# EAGLE board ELFKIN_TEST_A (EAGLE 7.7.0)
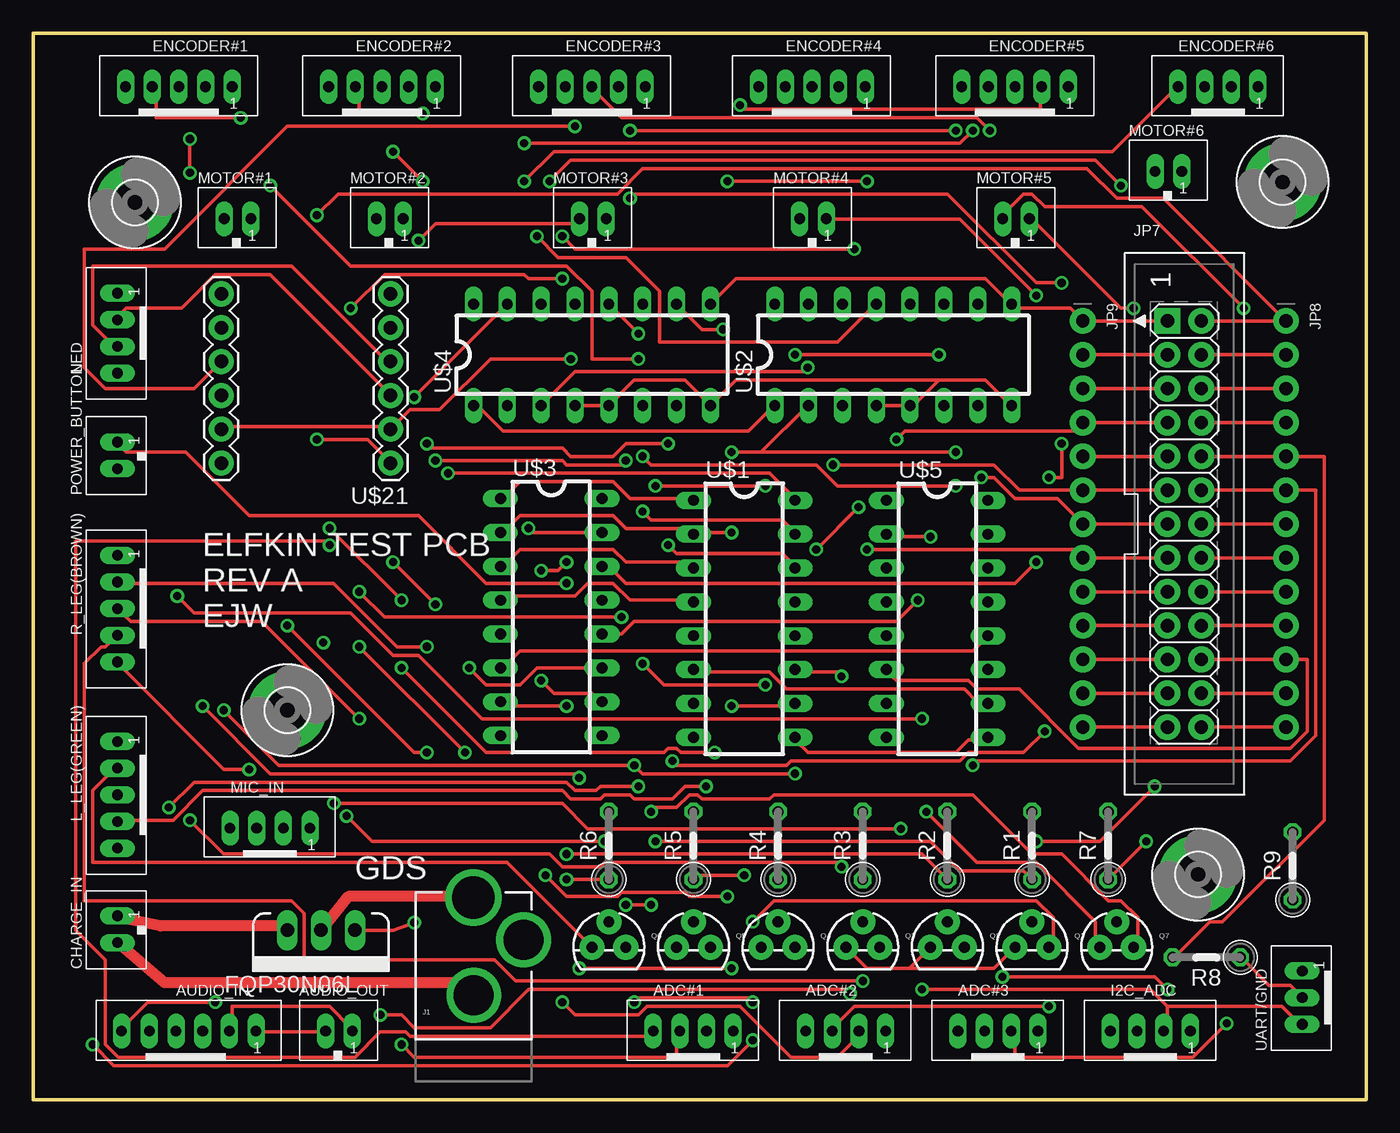
[diagram p0: board, top side]
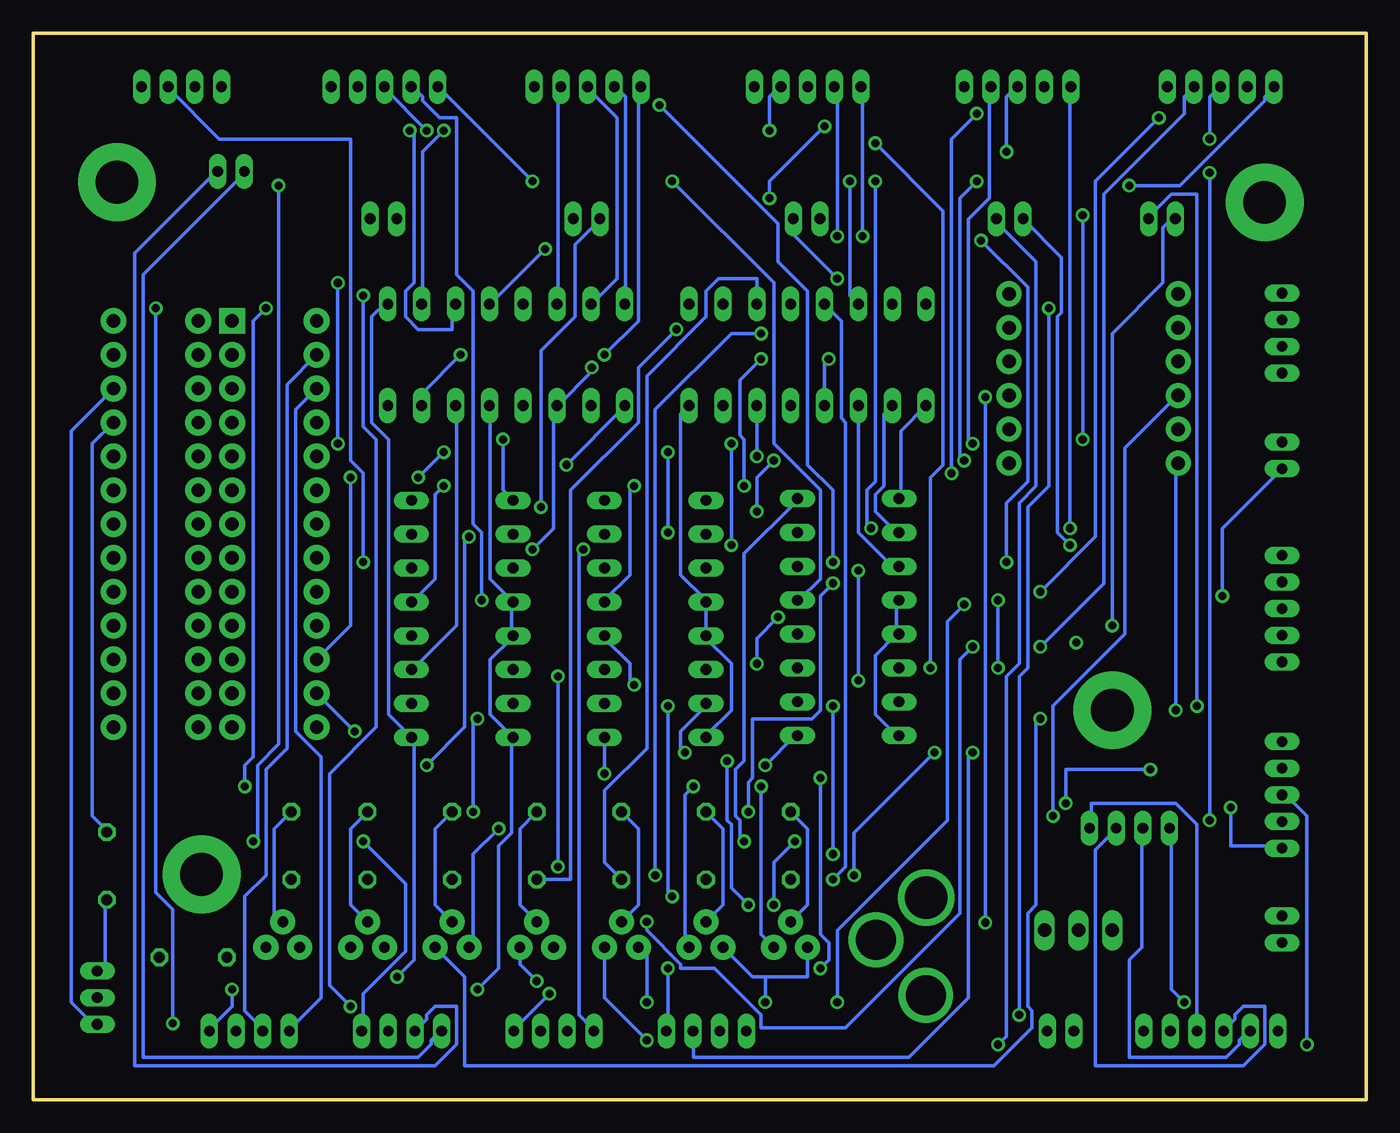
[diagram p1: board, bottom side, seen from below]

Size 100 x 80 mm. Coordinates in mm from the lower left corner, seen from the top.
Outline: 0,80 100,80 100,0 0,0 0,80
Copper layers (1*16): Top 0.035mm / dielectric 1.5mm / Bottom 0.035mm
Design rules "default *": minimum track width 10mil, minimum drill 24mil, track to track 8mil, track to pad 8mil, pad to pad 8mil, via to via 8mil, smd to smd 8mil, copper to edge 80mil, drill to drill 8mil, minimum pad ring 10mil, minimum via ring 8mil, stop-mask expansion 4mil, vias tented up to drill 0mil, thermal gap 10mil
Net classes: 0 default: clearance 0.205 mm

## Footprints (pad centres in the part's own frame; a part is rotated, then mirrored left to right if it is on the bottom)
JST_B4B-PH_HEADER = drill 0.8 long: P1 2.98,0.048; P2 0.98,0.048; P3 -1.02,0.048; P4 -3.02,0.048
JST_B6B-PH_HEADER = drill 0.8 long: P1 4,0.048; P2 2,0.048; P3 0,0.048; P4 -2,0.048; P5 -4,0.048; P6 -6.076,0.048
JST_B2B-PH_HEADER = drill 0.8 long: P1 1.075,0.048; P2 -0.925,0.048
JST_B5B-PH_HEADER = drill 0.8 long: P1 4,0.048; P2 2,0.048; P3 0,0.048; P4 -2,0.048; P5 -4,0.048
TO220V = drill 1.016 long: 1 -2.54,0; 2 0,0; 3 2.54,0
3,2-PAD = drill 3.2 pad 5.842: B3,2 0,0
POWER_JACK_PTH_LOCK = drill 2.997 pad 4.115: GND 0.025,6.557; GNDBREAK 3.762,10.7 | drill 3.2 pad 4.115: PWR 0,13.878
RASBERRYPI_IDC = drill 1 pad 1.93 square: 1 -1.27,15.24 | drill 1 pad 1.93: 2 1.27,15.24; 3 -1.27,12.7; 4 1.27,12.7; 5 -1.27,10.16; 6 1.27,10.16; 7 -1.27,7.62; 8 1.27,7.62; 9 -1.27,5.08; 10 1.27,5.08; 11 -1.27,2.54; 12 1.27,2.54; 13 -1.27,0; 14 1.27,0; 15 -1.27,-2.54; 16 1.27,-2.54; 17 -1.27,-5.08; 18 1.27,-5.08; 19 -1.27,-7.62; 20 1.27,-7.62; 21 -1.27,-10.16; 22 1.27,-10.16; 23 -1.27,-12.7; 24 1.27,-12.7; 25 -1.27,-15.24; 26 1.27,-15.24
1X13_ROUND_76MIL = drill 1 pad 1.93: 1 -15.24,0; 2 -12.7,0; 3 -10.16,0; 4 -7.62,0; 5 -5.08,0; 6 -2.54,0; 7 0,0; 8 2.54,0; 9 5.08,0; 10 7.62,0; 11 10.16,0; 12 12.7,0; 13 15.24,0
TO-92 = drill 0.813 pad 1.88: 1 -1.27,0; 2 0,1.905; 3 1.27,0
0207/5V = drill 0.813 octagon: 1 -2.54,0; 2 2.54,0
DIL16 = drill 0.813 long: 1 -8.89,-3.81; 2 -6.35,-3.81; 3 -3.81,-3.81; 4 -1.27,-3.81; 5 1.27,-3.81; 6 3.81,-3.81; 7 6.35,-3.81; 8 8.89,-3.81; 9 8.89,3.81; 10 6.35,3.81; 11 3.81,3.81; 12 1.27,3.81; 13 -1.27,3.81; 14 -3.81,3.81; 15 -6.35,3.81; 16 -8.89,3.81
LEVEL_SHIFTER = drill 1.016 pad 1.88: 1 6.35,7.62; 2 6.35,5.08; 3 6.35,2.54; 4 6.35,0; 5 6.35,-2.54; 6 6.35,-5.08; 7 -6.35,7.62; 8 -6.35,5.08; 9 -6.35,2.54; 10 -6.35,0; 11 -6.35,-2.54; 12 -6.35,-5.08
JST_B3B-PH_HEADER = drill 0.8 long: P1 2.027,0.048; P2 0.028,0.048; P3 -1.972,0.048

## Placement (x,y rotation side)
ADC#1  JST-PH_4-PIN_HEADER  [JST_B4B-PH_HEADER]  49.53,5.08 0 top
ADC#2  JST-PH_4-PIN_HEADER  [JST_B4B-PH_HEADER]  60.96,5.08 0 top
ADC#3  JST-PH_4-PIN_HEADER  [JST_B4B-PH_HEADER]  72.39,5.08 0 top
AUDIO_IN  JST-PH-6-PIN_HEADERJST_B6B-PH_HEADER  [JST_B6B-PH_HEADER]  12.7,5.08 0 top
AUDIO_OUT  JST-PH_2-PIN_HEADER  [JST_B2B-PH_HEADER]  22.86,5.08 0 top
CHARGE_IN  JST-PH_2-PIN_HEADER  [JST_B2B-PH_HEADER]  6.35,12.7 90 top
ENCODER#1  JST-PH_5-PIN_HEADER  [JST_B5B-PH_HEADER]  10.92,75.95 0 top
ENCODER#2  JST-PH_5-PIN_HEADER  [JST_B5B-PH_HEADER]  26.16,75.95 0 top
ENCODER#3  JST-PH_5-PIN_HEADER  [JST_B5B-PH_HEADER]  41.91,75.95 0 top
ENCODER#4  JST-PH_5-PIN_HEADER  [JST_B5B-PH_HEADER]  58.42,75.95 0 top
ENCODER#5  JST-PH_5-PIN_HEADER  [JST_B5B-PH_HEADER]  73.66,75.95 0 top
ENCODER#6  JST-PH_4-PIN_HEADER  [JST_B4B-PH_HEADER]  88.9,75.95 0 top
FQP30N06L  MOSFET-NCHANNELFQP30N06L  [TO220V]  21.59,12.7 180 top
FRAME1  FRAME-LETTER  [CREATIVE_COMMONS]  -101.6,1.27 0 top  (outside the outline)
H1  MOUNT-PAD-ROUND3.2  [3,2-PAD]  19.05,29.21 0 top
H2  MOUNT-PAD-ROUND3.2  [3,2-PAD]  87.38,16.89 0 top
H3  MOUNT-PAD-ROUND3.2  [3,2-PAD]  7.62,67.31 0 top
H4  MOUNT-PAD-ROUND3.2  [3,2-PAD]  93.73,68.83 0 top
I2C_ADC  JST-PH_4-PIN_HEADER  [JST_B4B-PH_HEADER]  83.82,5.08 0 top
J1  POWER_JACKPTH_LOCK  [POWER_JACK_PTH_LOCK]  33.02,1.27 0 top
JP7  PI  [RASBERRYPI_IDC]  86.36,43.18 0 top
JP8  Right  [1X13_ROUND_76MIL]  93.98,43.18 270 top
JP9  Left  [1X13_ROUND_76MIL]  78.74,43.18 270 top
L_LEG(GREEN)  JST-PH_5-PIN_HEADER  [JST_B5B-PH_HEADER]  6.35,22.86 90 top
LED  JST-PH_4-PIN_HEADER  [JST_B4B-PH_HEADER]  6.35,57.53 90 top
MIC_IN  JST-PH_4-PIN_HEADER  [JST_B4B-PH_HEADER]  17.78,20.32 0 top
MOTOR#1  JST-PH_2-PIN_HEADER  [JST_B2B-PH_HEADER]  15.24,66.04 0 top
MOTOR#2  JST-PH_2-PIN_HEADER  [JST_B2B-PH_HEADER]  26.67,66.04 0 top
MOTOR#3  JST-PH_2-PIN_HEADER  [JST_B2B-PH_HEADER]  41.91,66.04 0 top
MOTOR#4  JST-PH_2-PIN_HEADER  [JST_B2B-PH_HEADER]  58.42,66.04 0 top
MOTOR#5  JST-PH_2-PIN_HEADER  [JST_B2B-PH_HEADER]  73.66,66.04 0 top
MOTOR#6  JST-PH_2-PIN_HEADER  [JST_B2B-PH_HEADER]  85.09,69.6 0 top
POWER_BUTTON  JST-PH_2-PIN_HEADER  [JST_B2B-PH_HEADER]  6.35,48.26 90 top
Q1  [TO-92]  74.93,11.43 0 top
Q2  [TO-92]  68.58,11.43 0 top
Q3  [TO-92]  62.23,11.43 0 top
Q4  [TO-92]  55.88,11.43 0 top
Q5  [TO-92]  49.53,11.43 0 top
Q6  [TO-92]  43.18,11.43 0 top
Q7  [TO-92]  81.28,11.43 0 top
R1  1k  [0207/5V]  74.93,19.05 90 top
R2  1k  [0207/5V]  68.58,19.05 90 top
R3  1k  [0207/5V]  62.23,19.05 90 top
R4  1k  [0207/5V]  55.88,19.05 90 top
R5  1k  [0207/5V]  49.53,19.05 90 top
R6  1k  [0207/5V]  43.18,19.05 90 top
R7  [0207/5V]  80.64,19.05 90 top
R8  2.2k  [0207/5V]  88.01,10.67 180 top
R9  2.2k  [0207/5V]  94.49,17.53 90 top
R_LEG(BROWN)  JST-PH_5-PIN_HEADER  [JST_B5B-PH_HEADER]  6.35,36.83 90 top
U$1  74LVC138ADDIL16  [DIL16]  53.34,36.07 270 top
U$2  74LVC138ADDIL16  [DIL16]  64.52,55.88 0 top
U$3  74LVC138ADDIL16  [DIL16]  38.86,36.2 270 top
U$4  74LVC138ADDIL16  [DIL16]  41.91,55.88 0 top
U$5  74LVC138ADDIL16  [DIL16]  67.82,36.07 270 top
U$21  LEVEL_SHIFTER  [LEVEL_SHIFTER]  20.45,55.37 180 top
UART/GND  JST-PH_3-PIN_HEADER  [JST_B3B-PH_HEADER]  95.25,7.62 90 top

## Library data of the parts
ADC#1-ADC#3 AUDIO_OUT CHARGE_IN ENCODER#1-ENCODER#6 I2C_ADC L_LEG(GREEN) LED MIC_IN MOTOR#1-MOTOR#6 POWER_BUTTON R_LEG(BROWN) UART/GND = SRG
AUDIO_IN = JST_Connectors
FQP30N06L = SparkFun-DiscreteSemi; PROD_ID: TRANS-10060
FRAME1 = SparkFun-Aesthetics
H1-H4 = holes
J1 = SparkFun-Connectors; PROD_ID: CONN-08197; SF_ID: PRT-00119
JP7-JP9 = microbuilder
Q1-Q7 = SparkFun-DiscreteSemi; PROD_ID: TRANS-08447
R1-R9 = resistor
U$1-U$5 = SparkFun-DigitalIC
U$21 = SparkFun-Connectors

## Nets
3.3V: I2C_ADC.P1 JP7.1 JP9.1 U$1.9 U$2.9 U$3.9 U$4.9 U$5.9 U$21.1
5.0V: JP7.2 JP8.1 U$21.7
GND: I2C_ADC.P2 JP7.6 JP8.3 U$1.4 U$1.5 U$1.8 U$2.4 U$2.5 U$2.8 U$3.4 U$3.5 U$3.8 U$4.4 U$4.5 U$4.8 U$5.4 U$5.5 U$5.8 U$21.2 U$21.8 UART/GND.P3
N$1: JP7.11 JP9.6 U$1.1 U$2.1 U$3.1 U$4.1
N$2: JP7.13 JP9.7 U$1.2 U$2.2 U$3.2 U$4.2
N$3: JP7.15 JP9.8 U$1.3 U$2.3 U$3.3 U$4.3
N$4: ENCODER#1.P2 U$1.10
N$5: ENCODER#1.P3 U$1.11
N$6: ENCODER#1.P4 U$1.12
N$7: ENCODER#1.P5 U$1.13
N$8: ENCODER#2.P2 U$1.14
N$9: ENCODER#2.P3 U$1.15
N$10: ENCODER#2.P4 U$1.16
N$11: ENCODER#2.P5 U$1.7
N$12: ENCODER#3.P2 U$2.10
N$13: ENCODER#3.P3 U$2.11
N$14: ENCODER#3.P4 U$2.12
N$15: ENCODER#3.P5 U$2.13
N$16: ENCODER#4.P2 U$2.14
N$17: ENCODER#4.P3 U$2.15
N$18: ENCODER#4.P4 U$2.16
N$19: ENCODER#4.P5 U$2.7
N$20: ENCODER#5.P2 U$3.10
N$21: ENCODER#5.P3 U$3.11
N$22: ENCODER#5.P4 U$3.12
N$23: ENCODER#5.P5 U$3.13
N$24: ENCODER#6.P2 U$3.14
N$25: ENCODER#6.P4 U$3.15
N$26: R2.1 U$3.7
N$27: ADC#1.P1 MOTOR#1.P1
N$28: ADC#1.P2 MOTOR#1.P2
N$29: ADC#1.P3 MOTOR#2.P1
N$30: ADC#1.P4 MOTOR#2.P2
N$31: ADC#2.P1 MOTOR#3.P1
N$32: ADC#2.P2 MOTOR#3.P2
N$33: ADC#2.P3 MOTOR#4.P1
N$34: ADC#2.P4 MOTOR#4.P2
N$35: ADC#3.P1 MOTOR#5.P1
N$36: ADC#3.P2 MOTOR#5.P2
N$37: ADC#3.P3 MOTOR#6.P1
N$38: ADC#3.P4 MOTOR#6.P2
N$39: Q1.2 R1.2
N$40: Q3.2 R3.2
N$41: Q2.2 R2.2
N$42: Q4.2 R4.2
N$43: Q5.2 R5.2
N$44: Q6.2 R6.2
N$45: R1.1 U$3.16
N$46: R3.1 U$4.10
N$47: R4.1 U$4.11
N$48: R5.1 U$4.12
N$49: Q1.1 Q2.1 Q3.1 R_LEG(BROWN).P5
N$50: R6.1 U$4.13
N$51: AUDIO_IN.P3 MIC_IN.P1
N$52: I2C_ADC.P4 JP7.5 JP9.3
N$53: JP7.7 JP9.4 U$5.1
N$54: JP7.9 JP9.5
N$55: L_LEG(GREEN).P2 Q4.1 Q5.1 Q6.1
N$56: L_LEG(GREEN).P3 Q4.3
N$57: Q1.3 R_LEG(BROWN).P2
N$58: JP7.17 JP9.9
N$59: JP7.19 JP9.10
N$60: JP7.18 JP8.9
N$61: JP7.23 JP9.12 U$21.3
N$62: JP7.25 JP9.13
N$63: JP7.4 JP8.2
N$64: Q2.3 R_LEG(BROWN).P3
N$65: JP7.10 JP8.5 R8.2
N$66: JP7.12 JP8.6 U$5.2
N$67: JP7.14 JP8.7
N$68: JP7.16 JP8.8
N$70: JP7.20 JP8.10
N$71: JP7.22 JP8.11 U$5.6
N$72: JP7.24 JP8.12
N$73: JP7.26 JP8.13
N$74: L_LEG(GREEN).P4 Q5.3
N$75: L_LEG(GREEN).P5 Q6.3
N$76: I2C_ADC.P3 JP7.3 JP9.2
N$77: AUDIO_IN.P4 MIC_IN.P2
N$78: Q7.2 R7.2
N$79: POWER_BUTTON.P1 Q7.3
N$80: POWER_BUTTON.P2 Q7.1
N$81: R7.1 U$4.14
N$82: CHARGE_IN.P2 J1.GND
N$83: FQP30N06L.2 J1.PWR
N$84: FQP30N06L.1 U$4.15
N$85: AUDIO_IN.P2 AUDIO_OUT.P1
N$86: AUDIO_IN.P1 AUDIO_OUT.P2
N$87: U$1.6 U$5.10
N$88: U$2.6 U$5.11
N$89: U$3.6 U$5.12
N$90: Q3.3 R_LEG(BROWN).P4
N$91: U$4.6 U$5.13
N$92: JP7.8 JP8.4 R9.2
N$93: AUDIO_IN.P5 MIC_IN.P3
N$94: AUDIO_IN.P6 MIC_IN.P4
N$95: LED.P2 U$21.9
N$96: LED.P3 U$21.10
N$97: R8.1 UART/GND.P2
N$98: R9.1 UART/GND.P1
N$100: JP7.21 JP9.11 U$21.4
V_IN+: CHARGE_IN.P1 FQP30N06L.3

## Tracks (layer width: path | path; a pad name or v marks a point on that pad's centre or on a via)
3.3V  (via drill 0.61)
  Top 0.254: JP7.1 JP9.1 77.79,59.37 73.98,59.37 73.66,59.69 U$2.9 73.34,59.69 71.44,61.59 52.7,61.59 U$4.9 | v85.09,8.26 84.14,9.21 v72.71,9.21 | U$1.9 57.15,26.99 58.1,26.04 69.22,26.04 70.17,26.99 71.44,26.99 U$5.9 | v57.15,24.45 45.72,24.45 v45.09,25.08 18.41,25.08 v14.29,29.21
  Bottom 0.254: v85.09,8.26 85.09,6.99 86.68,5.4 I2C_ADC.P1 | v72.71,9.21 71.44,10.48 71.44,26.99 U$5.9 73.34,28.89 73.34,49.53 74.61,50.8 74.61,58.74 73.66,59.69 U$2.9 | v45.09,25.08 42.86,27.3 U$3.9 | U$1.9 v57.15,24.45 | v14.29,29.21 14.29,47.62 U$21.1
5.0V  (via drill 0.61)
  Top 0.254: v21.27,49.53 25.08,49.53 26.67,47.94 U$21.7 | v21.27,66.36 22.86,67.94 43.81,67.94 45.72,69.85 79.06,69.85 81.28,67.63 84.77,67.63 JP8.1 JP7.2
  Bottom 0.254: v21.27,66.36 v21.27,49.53
GND  (via drill 0.61)
  Top 0.254: JP8.3 JP7.6 | 85.09,6.99 85.09,5.4 I2C_ADC.P2 | 85.09,6.99 93.66,6.99 94.93,5.71 UART/GND.P3 | U$3.4 35.24,37.47 35.56,37.78 40.64,37.78 41.59,38.73 43.5,38.73 44.77,37.47 49.53,37.47 U$1.4 | U$21.2 14.29,50.48 26.67,50.48 U$21.8 28.26,51.75 30.48,51.75 34.29,55.56 v40.32,55.56 | U$4.4 U$4.5 45.09,53.98 48.9,53.98 U$4.8 52.7,53.98 67.94,53.98 | U$2.4 U$2.5 66.04,52.07 67.94,53.98 | 67.94,53.98 71.44,53.98 73.34,52.07 U$2.8 | 85.09,6.99 83.82,8.26 v66.67,8.26
  Bottom 0.254: JP8.3 97.16,50.16 97.16,7.3 95.25,5.4 UART/GND.P3 | 35.24,34.92 36.83,33.34 36.83,28.89 35.24,27.3 U$3.8 | 35.24,34.92 35.24,37.47 U$3.4 | 35.24,34.92 U$3.5 | U$1.8 49.53,27.3 47.62,29.21 47.62,32.7 49.53,34.61 U$1.5 U$1.4 49.53,37.47 51.44,39.37 51.44,51.44 U$4.8 | U$2.5 65.72,52.07 65.72,39.05 U$5.4 64.14,37.15 64.14,34.92 U$5.5 64.14,34.61 65.72,33.02 65.72,28.89 U$5.8 64.14,26.99 64.14,20 65.09,19.05 65.09,9.84 v66.67,8.26 | v40.32,55.56 40.64,55.24 U$4.4
N$1  (via drill 0.61)
  Top 0.254: JP7.11 JP9.6 73.98,45.72 72.07,47.62 v60.01,47.62 | U$1.1 49.53,45.09 44.77,45.09 43.5,46.35 36.51,46.35 35.24,45.09 U$3.1 | U$4.1 33.34,52.07 35.24,50.16 53.66,50.16 55.56,52.07 U$2.1
  Bottom 0.254: U$4.1 34.92,50.16 34.92,45.09 U$3.1 | v60.01,47.62 55.88,51.75 55.88,52.07 U$2.1
N$2  (via drill 0.61)
  Top 0.254: JP7.13 JP9.7 76.83,45.09 73.66,45.09 72.07,46.67 v71.12,46.67 | 49.53,42.55 49.21,42.86 44.45,42.86 43.5,43.81 36.51,43.81 35.24,42.55 U$3.2 | 54.61,48.58 58.1,52.07 U$2.2 | v52.39,48.58 54.61,48.58 | 49.53,42.55 v52.39,42.55 | 49.53,42.55 U$1.2 | 54.61,48.58 v69.22,48.58
  Bottom 0.254: U$4.2 36.2,51.44 36.2,46.04 36.83,45.4 36.83,44.13 35.24,42.55 U$3.2 | v52.39,42.55 v52.39,48.58 | v69.22,48.58 v71.12,46.67
N$3  (via drill 0.61)
  Top 0.254: JP7.15 JP9.8 78.11,41.27 v62.55,41.27 | U$1.3 49.53,40.01 49.21,40.32 44.45,40.32 43.5,41.27 36.51,41.27 35.24,40.01 U$3.3 | v58.1,54.93 57.78,54.61 40.64,54.61 U$4.3
  Bottom 0.254: U$4.3 38.1,42.55 35.56,40.01 U$3.3 | v58.1,54.93 58.1,54.61 60.64,52.07 U$2.3 60.96,52.07 60.96,42.86 v62.55,41.27
N$4  (via drill 0.61)
  Top 0.254: v32.38,26.04 v24.45,33.97 | v38.42,16.83 40.01,15.24 43.81,15.24 44.13,15.56 48.9,15.56 49.21,15.24 v52.07,15.24 | v52.39,29.53 57.15,29.53 U$1.10
  Bottom 0.254: v24.45,33.97 19.68,38.73 19.68,67.94 13.65,73.98 13.65,75.25 13.02,75.88 ENCODER#1.P2 | v32.38,26.04 38.42,20 v38.42,16.83 | v52.07,15.24 52.39,15.56 v52.39,29.53
N$5  (via drill 0.61)
  Top 0.254: v11.75,69.53 v11.75,72.07 | v11.75,20.95 14.29,18.41 38.73,18.41 39.69,17.46 42.55,17.46 42.86,17.78 60.33,17.78 v60.64,17.46 | v60.64,31.75 60.33,32.07 57.15,32.07 U$1.11
  Bottom 0.254: v11.75,72.07 11.75,75.25 11.11,75.88 ENCODER#1.P3 | v11.75,20.95 v11.75,69.53 | v60.64,31.75 v60.64,17.46
N$6  (via drill 0.61)
  Top 0.254: v15.56,73.66 9.21,73.66 9.21,75.88 ENCODER#1.P4 | v24.45,38.1 26.35,36.2 v44.13,36.2 | v45.72,32.7 47.31,31.11 v54.93,31.11
  Bottom 0.254: v15.56,73.66 20.32,68.9 20.32,42.23 v24.45,38.1 | v44.13,36.2 45.72,34.61 v45.72,32.7 | v54.93,31.11 55.24,31.43 55.24,32.7 57.15,34.61 U$1.12
N$7  (via drill 0.61)
  Top 0.254: v17.78,68.58 23.81,62.55 40.01,62.55 41.91,60.64 41.91,55.56 v45.4,55.56 | v54.93,46.04 v46.67,46.04
  Bottom 0.254: v17.78,68.58 13.97,68.58 7.62,74.93 7.62,75.25 6.99,75.88 ENCODER#1.P5 | v45.4,55.56 46.99,53.98 46.99,49.85 46.67,49.53 v46.67,46.04 | v54.93,46.04 55.24,45.72 55.24,39.37 57.15,37.47 U$1.13
N$8  (via drill 0.61)
  Top 0.254: v29.53,49.21 29.84,48.9 39.69,48.9 40.32,48.26 43.5,48.26 44.45,49.21 v47.62,49.21 | v47.62,41.59 48.26,40.96 56.2,40.96 57.15,40.01 U$1.14
  Bottom 0.254: v29.53,49.21 29.84,49.53 29.84,66.04 28.26,67.63 28.26,75.88 ENCODER#2.P2 | v47.62,41.59 v47.62,49.21
N$9  (via drill 0.61)
  Top 0.254: v29.21,68.9 v26.99,71.12 | v30.16,47.94 39.69,47.94 40.01,47.62 44.13,47.62 v44.45,47.94 | v45.72,44.13 46.35,43.5 56.2,43.5 57.15,42.55 U$1.15
  Bottom 0.254: v26.99,71.12 26.99,75.25 26.35,75.88 ENCODER#2.P3 | v29.21,68.9 30.48,67.63 30.48,48.26 v30.16,47.94 | v44.45,47.94 45.72,46.67 v45.72,44.13
N$10  (via drill 0.61)
  Top 0.254: v29.21,73.98 24.45,73.98 24.45,75.88 ENCODER#2.P4 | v31.11,46.99 55.24,46.99 57.15,45.09 U$1.16
  Bottom 0.254: v29.21,73.98 31.11,72.07 v31.11,46.99
N$11  (via drill 0.61)
  Top 0.254: v27.62,37.47 v22.23,42.86 | v27.62,32.38 33.97,26.04 47.31,26.04 47.62,26.35 48.26,26.35 48.58,26.04 v51.12,26.04
  Bottom 0.254: v22.23,42.86 22.23,75.88 ENCODER#2.P5 | v27.62,32.38 v27.62,37.47 | v51.12,26.04 51.44,26.35 51.44,27.62 49.53,29.53 U$1.7
N$12  (via drill 0.61)
  Top 0.254: v69.22,72.71 v44.77,72.71
  Bottom 0.254: v44.77,72.71 44.77,75.25 44.13,75.88 ENCODER#3.P2 | v69.22,72.71 70.8,71.12 70.8,59.69 U$2.10
N$13  (via drill 0.61)
  Top 0.254: v71.75,72.71 70.8,73.66 44.13,73.66 41.91,75.88 ENCODER#3.P3
  Bottom 0.254: v71.75,72.71 71.44,72.39 71.44,61.28 72.07,60.64 72.07,58.74 71.12,57.78 68.58,57.78 68.58,59.69 U$2.11
N$14  (via drill 0.61)
  Top 0.254: v39.69,64.77 40.64,63.82 v61.59,63.82
  Bottom 0.254: v39.69,64.77 39.69,75.88 ENCODER#3.P4 | v61.59,63.82 65.72,59.69 U$2.12
N$15  (via drill 0.61)
  Top 0.254: v37.78,64.77 39.37,63.18 44.45,63.18 46.99,60.64 46.99,56.83 60.33,56.83 63.18,59.69 U$2.13
  Bottom 0.254: v37.78,64.77 37.78,75.88 ENCODER#3.P5
N$16
  Bottom 0.254: ENCODER#4.P2 60.64,75.88 60.64,59.69 U$2.14
N$17
  Bottom 0.254: ENCODER#4.P3 58.42,75.88 56.2,73.66 56.2,61.59 58.1,59.69 U$2.15
N$18
  Bottom 0.254: ENCODER#4.P4 56.2,75.88 55.56,75.25 55.56,59.69 U$2.16
N$19  (via drill 0.61)
  Top 0.254: v67.94,55.88 v57.15,55.88
  Bottom 0.254: v57.15,55.88 54.61,58.42 54.61,75.88 ENCODER#4.P5 | v67.94,55.88 70.8,53.02 70.8,52.07 U$2.7
N$20  (via drill 0.61)
  Top 0.254: v53.02,74.61 53.34,74.3 75.56,74.3 75.56,75.88 ENCODER#5.P2 | v40.01,40.32 39.37,39.69 v38.1,39.69 | v38.1,31.43 39.05,30.48 41.91,30.48 42.55,29.84 U$3.10
  Bottom 0.254: v53.02,74.61 44.13,65.72 44.13,62.87 41.91,60.64 41.91,47.62 40.01,45.72 v40.01,40.32 | v38.1,31.43 v38.1,39.69
N$21  (via drill 0.61)
  Top 0.254: v70.48,72.71 69.53,71.75 v36.83,71.75 | v32.7,32.38 33.97,31.11 36.51,31.11 37.78,32.38 U$3.11
  Bottom 0.254: v70.48,72.71 73.66,75.88 ENCODER#5.P3 | v36.83,71.75 31.75,66.67 31.75,47.62 32.7,46.67 v32.7,32.38
N$22  (via drill 0.61)
  Top 0.254: v66.36,37.47 64.77,35.88 45.09,35.88 44.13,34.92 U$3.12
  Bottom 0.254: v66.36,37.47 66.36,42.55 66.99,43.18 66.99,60.64 68.26,61.91 68.26,73.66 69.53,73.66 70.8,74.93 70.8,75.25 71.44,75.88 ENCODER#5.P4
N$23  (via drill 0.61)
  Top 0.254: v52.07,68.9 v62.55,68.9
  Bottom 0.254: v62.55,68.9 69.53,75.88 ENCODER#5.P5 | v52.07,68.9 44.45,61.28 44.45,49.21 40.96,45.72 40.96,39.05 42.55,37.47 U$3.13
N$24  (via drill 0.61)
  Top 0.254: v75.25,40.32 73.66,38.73 44.45,38.73 43.18,40.01 U$3.14
  Bottom 0.254: v75.25,40.32 75.25,46.99 76.2,47.94 76.2,72.07 86.04,72.07 89.85,75.88 ENCODER#6.P2
N$25  (via drill 0.61)
  Top 0.254: v36.83,68.9 39.05,71.12 80.96,71.12 85.72,75.88 ENCODER#6.P4 | v37.15,42.86 37.47,42.55 U$3.15
  Bottom 0.254: v36.83,68.9 36.83,46.35 37.47,45.72 37.47,43.18 v37.15,42.86
N$26  (via drill 0.61)
  Top 0.254: v40.01,29.53 35.56,29.53 35.24,29.84 U$3.7 | v40.01,18.41 66.67,18.41 R2.1
  Bottom 0.254: v40.01,18.41 v40.01,29.53
N$27  (via drill 0.61)
  Top 0.254: v12.7,29.53 17.78,24.45 40.64,24.45 v40.96,24.13 | v52.39,9.84 v40.96,9.84
  Bottom 0.254: v12.7,29.53 12.7,67.94 14.61,67.94 16.19,66.36 MOTOR#1.P1 | v40.96,24.13 40.96,12.38 40.32,11.75 40.32,10.48 v40.96,9.84 | v52.39,9.84 52.39,5.4 ADC#1.P1
N$28  (via drill 0.61)
  Top 0.254: v19.05,35.56 28.57,26.04 v29.53,26.04
  Bottom 0.254: v19.05,35.56 19.05,57.47 15.24,61.28 15.24,65.41 14.61,66.04 MOTOR#1.P2 | v29.53,26.04 29.84,25.72 29.84,7.62 34.29,3.17 50.48,3.17 50.48,5.08 ADC#1.P2
N$29  (via drill 0.61)
  Top 0.254: v27.62,4.13 28.57,3.17 48.26,3.17 48.26,5.08 ADC#1.P3
  Bottom 0.254: v27.62,4.13 26.99,4.76 26.99,31.75 26.04,32.7 26.04,44.77 24.77,46.04 24.77,62.87 27.62,65.72 27.62,66.04 MOTOR#2.P1
N$30  (via drill 0.61)
  Top 0.254: v22.23,41.59 21.91,41.91 3.17,41.91 3.17,12.7 5.4,10.48 5.4,4.13 6.35,3.17 24.13,3.17 26.04,5.08 27.94,5.08 28.26,4.76 46.04,4.76 46.35,5.08 ADC#1.P4
  Bottom 0.254: v22.23,41.59 23.18,42.55 23.18,58.74 22.86,59.05 22.86,63.18 25.72,66.04 MOTOR#2.P2
N$31  (via drill 0.61)
  Top 0.254: v61.28,7.94 60.96,8.26 37.15,8.26 34.29,5.4 28.57,5.4 27.62,6.35 v26.04,6.35 | v23.81,59.37 26.35,61.91 36.83,61.91 37.15,61.59 v39.69,61.59
  Bottom 0.254: v61.28,7.94 63.82,5.4 ADC#2.P1 | v26.04,6.35 26.04,31.75 25.4,32.38 25.4,44.45 23.81,46.04 v23.81,59.37 | v39.69,61.59 42.86,64.77 42.86,66.04 MOTOR#3.P1
N$32  (via drill 0.61)
  Top 0.254: v28.89,64.45 30.16,65.72 40.64,65.72 40.96,66.04 MOTOR#3.P2 | v30.16,37.15 v26.99,40.32 | v39.69,7.3 40.64,6.35 45.4,6.35 46.04,6.99 53.02,6.99 56.83,3.17 60.33,3.17 62.23,5.08 ADC#2.P2
  Bottom 0.254: v28.89,64.45 25.4,60.96 25.4,46.35 26.99,44.77 v26.99,40.32 | v30.16,37.15 31.43,35.88 31.43,20.95 39.69,12.7 v39.69,7.3
N$33  (via drill 0.61)
  Top 0.254: v76.2,6.99 61.59,6.99 60.01,5.4 ADC#2.P3 | v75.25,60.33 69.53,66.04 59.69,66.04 MOTOR#4.P1
  Bottom 0.254: v76.2,6.99 77.79,8.57 77.79,24.45 74.3,27.94 74.3,49.53 75.25,50.48 v75.25,60.33
N$34  (via drill 0.61)
  Top 0.254: v61.91,44.45 v58.74,41.27
  Bottom 0.254: v58.74,41.27 59.05,40.96 59.05,6.35 58.1,5.4 ADC#2.P4 | v61.91,44.45 61.91,56.2 59.37,58.74 59.37,64.14 57.78,65.72 57.78,66.04 MOTOR#4.P2
N$35  (via drill 0.61)
  Top 0.254: v82.55,59.37 81.6,59.37 74.93,66.04 MOTOR#5.P1 | v84.14,23.5 80.01,19.37 v75.25,19.37
  Bottom 0.254: v82.55,59.37 83.5,58.42 83.5,25.72 84.14,25.08 v84.14,23.5 | v75.25,19.37 72.07,16.19 72.07,11.11 75.25,7.94 75.25,5.4 ADC#3.P1
N$36  (via drill 0.61)
  Top 0.254: v89.53,5.71 87,3.17 73.66,3.17 73.66,5.08 ADC#3.P2 | v90.81,59.37 83.19,66.99 75.88,66.99 74.93,67.94 74.3,67.94 72.71,66.36 MOTOR#5.P2
  Bottom 0.254: v89.53,5.71 89.53,14.29 90.81,15.56 v90.81,59.37
N$37
  Bottom 0.254: ADC#3.P3 71.12,5.4 70.48,6.03 70.48,6.35 69.85,6.99 68.26,6.99 68.26,4.13 69.85,2.54 92.39,2.54 92.39,63.5 86.36,69.53 MOTOR#6.P1
N$38
  Bottom 0.254: ADC#3.P4 69.53,5.08 70.17,4.45 70.17,4.13 71.12,3.17 91.76,3.17 91.76,61.91 84.45,69.22 84.45,69.53 MOTOR#6.P2
N$39
  Bottom 0.254: R1.2 76.2,20.32 76.2,14.61 Q1.2
N$40
  Bottom 0.254: R3.2 63.5,20.32 63.5,14.61 Q3.2
N$41
  Bottom 0.254: R2.2 69.85,20.32 69.85,14.61 Q2.2
N$42
  Bottom 0.254: R4.2 54.61,20.32 54.61,14.61 Q4.2
N$43
  Bottom 0.254: R5.2 48.26,20.32 48.26,14.61 Q5.2
N$44
  Bottom 0.254: R6.2 41.91,20.32 41.91,14.61 Q6.2
N$45  (via drill 0.61)
  Top 0.254: R1.1 74.3,17.14 69.53,17.14 67.31,19.37 v46.67,19.37
  Bottom 0.254: v46.67,19.37 46.99,19.68 46.99,20.95 47.31,21.27 47.31,24.77 46.67,25.4 46.67,40.96 42.86,44.77 42.86,45.09 U$3.16
N$46  (via drill 0.61)
  Top 0.254: v51.75,57.78 50.16,57.78 U$4.10
  Bottom 0.254: R3.1 59.69,16.51 59.69,45.72 54.61,50.8 54.61,54.93 v51.75,57.78
N$47
  Bottom 0.254: R4.1 57.15,17.78 57.15,23.18 53.98,26.35 53.98,54.29 49.53,58.74 49.53,60.64 48.58,61.59 45.72,61.59 U$4.11
N$48  (via drill 0.61)
  Top 0.254: R5.1 49.85,16.83 v53.34,16.83 | U$4.12 v45.4,57.47
  Bottom 0.254: v53.34,16.83 53.34,51.75 47.62,57.47 v45.4,57.47
N$49  (via drill 0.61)
  Top 0.254: v16.19,24.77 14.29,24.77 6.35,32.7 R_LEG(BROWN).P5 | v22.54,22.23 39.69,22.23 41.59,20.32 v65.09,20.32 | Q3.1 62.55,9.84 65.72,9.84 | Q2.1 65.72,9.84 | Q1.1 72.07,9.84 65.72,9.84
  Bottom 0.254: v16.19,24.77 22.54,24.77 v22.54,22.23 | v65.09,20.32 66.99,18.41 66.99,11.75 Q2.1
N$50  (via drill 0.61)
  Top 0.254: v40.01,16.51 R6.1
  Bottom 0.254: v40.01,16.51 39.05,17.46 39.05,50.8 39.37,51.12 39.37,58.42 U$4.13
N$51
  Bottom 0.254: AUDIO_IN.P3 12.7,20.64 14.29,22.23 20.64,22.23 20.64,20.64 MIC_IN.P1
N$52
  Top 0.254: JP9.3 JP7.5
  Bottom 0.254: JP9.3 80.33,51.75 80.33,27.62 78.42,25.72 78.42,7.62 80.64,5.4 I2C_ADC.P4
N$53  (via drill 0.61)
  Top 0.254: v64.77,49.53 65.41,50.16 78.11,50.16 JP9.4 JP7.7
  Bottom 0.254: U$5.1 64.77,45.72 v64.77,49.53
N$54
  Top 0.254: JP7.9 JP9.5
N$55  (via drill 0.61)
  Top 0.254: Q6.1 35.56,17.78 4.45,17.78 4.45,23.18 6.03,24.77 L_LEG(GREEN).P2 | v53.98,7.3 53.66,7.62 45.4,7.62 v45.09,7.3
  Bottom 0.254: Q5.1 46.04,9.21 45.09,9.21 | 45.09,9.21 41.91,9.21 Q6.1 | Q4.1 53.98,10.79 v53.98,7.3 | 45.09,9.21 v45.09,7.3
N$56  (via drill 0.61)
  Top 0.254: v4.45,4.13 6.03,2.54 52.07,2.54 v53.98,4.45
  Bottom 0.254: v4.45,4.13 4.45,21.27 6.03,22.86 L_LEG(GREEN).P3 | v53.98,4.45 57.15,7.62 Q4.3
N$57  (via drill 0.61)
  Top 0.254: v29.53,33.97 27.3,33.97 22.54,38.73 6.35,38.73 R_LEG(BROWN).P2 | v53.98,13.34 55.56,14.92 75.25,14.92 76.52,13.65 76.52,11.43 Q1.3
  Bottom 0.254: v29.53,33.97 30.48,33.02 30.48,13.97 39.05,5.4 45.4,5.4 45.4,6.35 48.9,9.84 51.44,9.84 51.44,10.16 53.98,12.7 v53.98,13.34
N$58
  Top 0.254: JP7.17 JP9.9
N$59
  Top 0.254: JP7.19 JP9.10
N$60
  Top 0.254: JP8.9 JP7.18
N$61  (via drill 0.61)
  Top 0.254: v23.5,21.27 25.4,19.37 v42.86,19.37 | v46.35,14.61 v44.45,14.61 | v47.94,25.4 48.26,25.08 56.52,25.08 56.83,25.4 69.53,25.4 70.17,26.04 74.3,26.04 v75.88,27.62 | JP9.12 JP7.23
  Bottom 0.254: v23.5,21.27 23.5,29.53 18.1,34.92 18.1,48.9 14.29,52.7 U$21.3 | v42.86,19.37 44.45,17.78 v44.45,14.61 | v46.35,14.61 47.62,15.88 47.62,20.64 47.94,20.95 v47.94,25.4 | JP9.12 v75.88,27.62
N$62
  Top 0.254: JP7.25 JP9.13
N$63
  Top 0.254: JP8.2 JP7.4
N$64  (via drill 0.61)
  Top 0.254: v24.45,28.57 17.14,35.88 7.3,35.88 6.35,36.83 R_LEG(BROWN).P3
  Bottom 0.254: v24.45,28.57 24.77,28.26 24.77,14.61 25.4,13.97 25.4,6.99 25.08,6.67 25.08,5.4 27.94,2.54 67.63,2.54 67.63,9.21 Q2.3
N$65
  Top 0.254: R8.2 85.72,10.79 88.27,13.34 89.22,13.34 96.84,20.95 96.84,48.26 JP8.5 JP7.10
N$66  (via drill 0.61)
  Top 0.254: v67.31,42.23 64.14,42.23 U$5.2 | v70.48,25.08 70.8,25.4 94.3,25.4 96.2,27.3 96.2,45.72 JP8.6 JP7.12
  Bottom 0.254: v67.31,42.23 67.63,41.91 67.63,27.94 v70.48,25.08
N$67
  Top 0.254: JP8.7 JP7.14
N$68
  Top 0.254: JP8.8 JP7.16
N$69  (via drill 0.61)
  other vias: 21.75,34.29
N$70
  Top 0.254: JP8.10 JP7.20
N$71
  Top 0.254: U$5.6 64.14,32.07 64.77,31.43 70.17,31.43 70.8,30.8 73.98,30.8 78.42,26.35 94.3,26.35 95.57,27.62 95.57,33.02 JP8.11 JP7.22
N$72
  Top 0.254: JP8.12 JP7.24
N$73
  Top 0.254: JP8.13 JP7.26
N$74  (via drill 0.61)
  Top 0.254: v50.48,23.5 48.9,23.5 47.94,22.54 45.09,22.54 44.77,22.86 42.86,22.86 42.55,22.54 40.32,22.54 39.69,23.18 12.7,23.18 10.48,20.95 6.35,20.95 L_LEG(GREEN).P4
  Bottom 0.254: v50.48,23.5 51.12,22.86 51.12,11.75 Q5.3
N$75  (via drill 0.61)
  Top 0.254: v10.16,21.91 12.06,23.81 40.01,23.81 40.64,23.18 42.23,23.18 42.55,23.5 v45.4,23.5
  Bottom 0.254: v10.16,21.91 10.16,19.05 6.35,19.05 L_LEG(GREEN).P5 | v45.4,23.5 45.4,12.38 Q6.3
N$76
  Top 0.254: JP9.2 JP7.3
  Bottom 0.254: JP9.2 80.96,53.66 80.96,26.35 82.55,24.77 82.55,16.83 84.14,15.24 84.14,6.67 82.87,5.4 I2C_ADC.P3
N$77
  Bottom 0.254: AUDIO_IN.P4 10.48,5.4 9.84,6.03 9.84,6.35 9.21,6.99 7.62,6.99 7.62,4.13 9.21,2.54 20.32,2.54 20.32,18.73 19.05,20 19.05,20.32 MIC_IN.P2
N$78
  Bottom 0.254: R7.2 81.92,20.32 81.92,13.97 Q7.2
N$79  (via drill 0.61)
  Top 0.254: v40.01,38.73 33.97,38.73 28.89,43.81 16.19,43.81 11.43,48.58 6.99,48.58 6.35,49.21 POWER_BUTTON.P1 | v46.35,21.59 46.67,21.91 48.26,21.91 49.21,22.86 49.85,22.86 50.16,22.54 55.24,22.54 55.56,22.86 70.48,22.86 74.93,18.41 77.15,18.41 80.64,14.92 81.6,14.92 82.87,13.65 82.87,11.43 Q7.3
  Bottom 0.254: v40.01,38.73 40.96,37.78 40.96,29.21 41.59,28.57 46.04,28.57 46.04,24.13 46.35,23.81 v46.35,21.59
N$80  (via drill 0.61)
  Top 0.254: v10.79,37.78 12.06,36.51 23.81,36.51 26.99,33.34 28.89,33.34 33.66,28.57 v66.67,28.57 | v66.99,21.59 70.8,17.78 75.25,17.78 79.69,13.34 79.69,11.43 Q7.1
  Bottom 0.254: v10.79,37.78 10.79,42.86 6.35,47.31 POWER_BUTTON.P2 | v66.67,28.57 66.99,28.26 v66.99,21.59
N$81  (via drill 0.61)
  Top 0.254: v83.5,19.37 R7.1 | v81.6,68.58 79.69,70.48 40.32,70.48 v38.73,68.9
  Bottom 0.254: v83.5,19.37 83.19,19.68 83.19,25.08 81.6,26.67 v81.6,68.58 | v38.73,68.9 38.73,60.33 U$4.14
N$82
  Top 0.254: 6.35,11.75 CHARGE_IN.P2 | 33.02,7.94 J1.GND
  Top 0.813: 6.35,11.75 9.84,8.76 32.7,8.76 33.02,7.94
N$83
  Top 0.813: FQP30N06L.2 23.62,15.24 33.02,15.24 J1.PWR
N$84  (via drill 0.61)
  Top 0.254: v28.57,52.7 U$4.15 | v28.57,13.27 26.99,12.7 FQP30N06L.1
  Bottom 0.254: v28.57,13.27 v28.57,52.7
N$85
  Top 0.254: AUDIO_IN.P2 14.92,5.4 14.92,6.99 22.23,6.99 23.81,5.4 AUDIO_OUT.P1
N$86
  Top 0.254: AUDIO_IN.P1 16.83,5.08 21.91,5.08 AUDIO_OUT.P2
N$87
  Top 0.254: U$1.6 49.53,32.07 55.24,32.07 56.52,30.8 69.85,30.8 70.8,29.84 71.44,29.84 U$5.10
N$88
  Bottom 0.254: U$5.11 71.44,32.38 68.26,35.56 68.26,52.07 U$2.6
N$89
  Top 0.254: U$5.12 70.48,33.66 36.51,33.66 35.24,32.38 U$3.6
N$90  (via drill 0.61)
  Top 0.254: v62.23,8.89 36.2,8.89 34.61,10.48 20.32,10.48 20.32,13.97 19.37,14.92 3.81,14.92 3.81,32.7 5.08,33.97 5.4,33.97 6.03,34.61 R_LEG(BROWN).P4
  Bottom 0.254: v62.23,8.89 63.5,10.16 Q3.3
N$91  (via drill 0.61)
  Top 0.254: v45.72,48.26 46.35,47.62 58.74,47.62 60.33,46.04 v69.22,46.04
  Bottom 0.254: v45.72,48.26 U$4.6 | v69.22,46.04 69.85,45.4 69.85,39.05 71.44,37.47 U$5.13
N$92
  Top 0.254: JP8.4 JP7.8
  Bottom 0.254: JP8.4 95.57,49.21 95.57,21.27 94.61,20.32 R9.2
N$93
  Bottom 0.254: AUDIO_IN.P5 8.89,5.08 9.53,4.45 9.53,4.13 10.48,3.17 17.78,3.17 17.78,10.48 16.83,11.43 16.83,20.32 MIC_IN.P3
N$94  (via drill 0.61)
  Top 0.254: v13.65,7.3 8.57,7.3 6.67,5.4 AUDIO_IN.P6
  Bottom 0.254: v13.65,7.3 14.61,8.26 14.61,20.32 MIC_IN.P4
N$95
  Top 0.254: LED.P2 6.35,58.74 6.99,59.37 11.11,59.37 13.65,61.91 17.78,61.91 26.67,53.02 U$21.9
N$96
  Top 0.254: LED.P3 6.03,56.52 4.45,58.1 4.45,62.55 19.37,62.55 26.35,55.56 26.67,55.56 U$21.10
N$97
  Top 0.254: UART/GND.P2 94.93,7.94 94.3,8.57 92.71,8.57 90.81,10.48 R8.1
N$98
  Bottom 0.254: UART/GND.P1 94.93,9.84 94.61,10.16 94.61,14.92 R9.1
N$100  (via drill 0.61)
  Top 0.254: U$21.4 12.06,53.34 5.4,53.34 3.81,54.93 3.81,63.82 9.84,63.82 19.05,73.03 v40.64,73.03 | v44.77,67.63 45.09,67.94 68.58,67.94 75.25,61.28 v77.15,61.28 | v77.15,49.21 77.15,46.67 v76.2,46.67 | JP9.11 JP7.21
  Bottom 0.254: v40.64,73.03 44.77,68.9 v44.77,67.63 | v77.15,49.21 v77.15,61.28 | v76.2,46.67 76.2,35.56 JP9.11
V_IN+
  Top 0.813: FQP30N06L.3 18.73,13.02 9.53,13.02 6.35,13.65 CHARGE_IN.P1

## Text on the board
tPlace: ELFKIN TEST PCB / REV A / EJW | GDS
tSilk: R LEG (BROWN)